# Altium PCB PS3604LRCF.PcbDoc
Units mm, origin at the board's own origin, x right, y up, seen from the top; angles counter-clockwise.
Board outline 120 x 39 mm, 2 copper layers (Top Layer, Bottom Layer), stack 1.571 mm thick; 97 components, 41 nets, 241 pads, 84 vias.
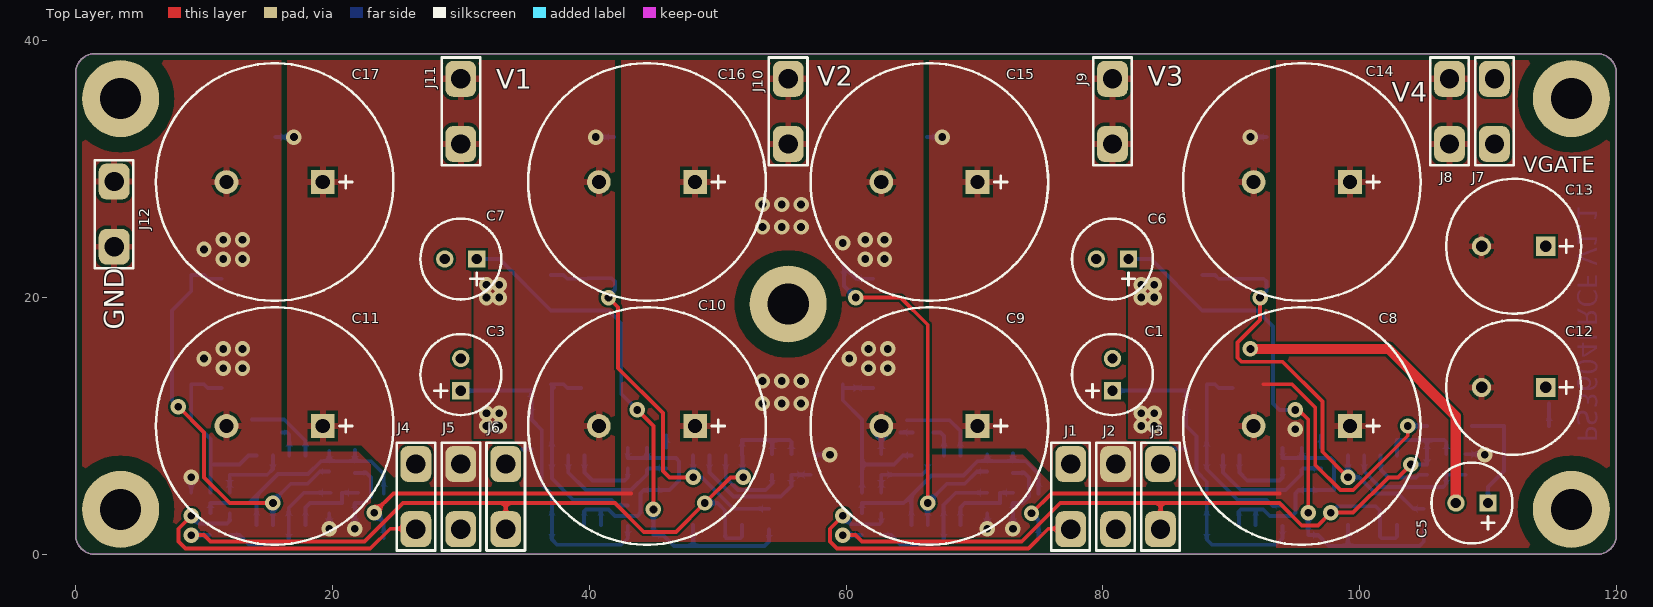
[diagram p0: Top Layer view]
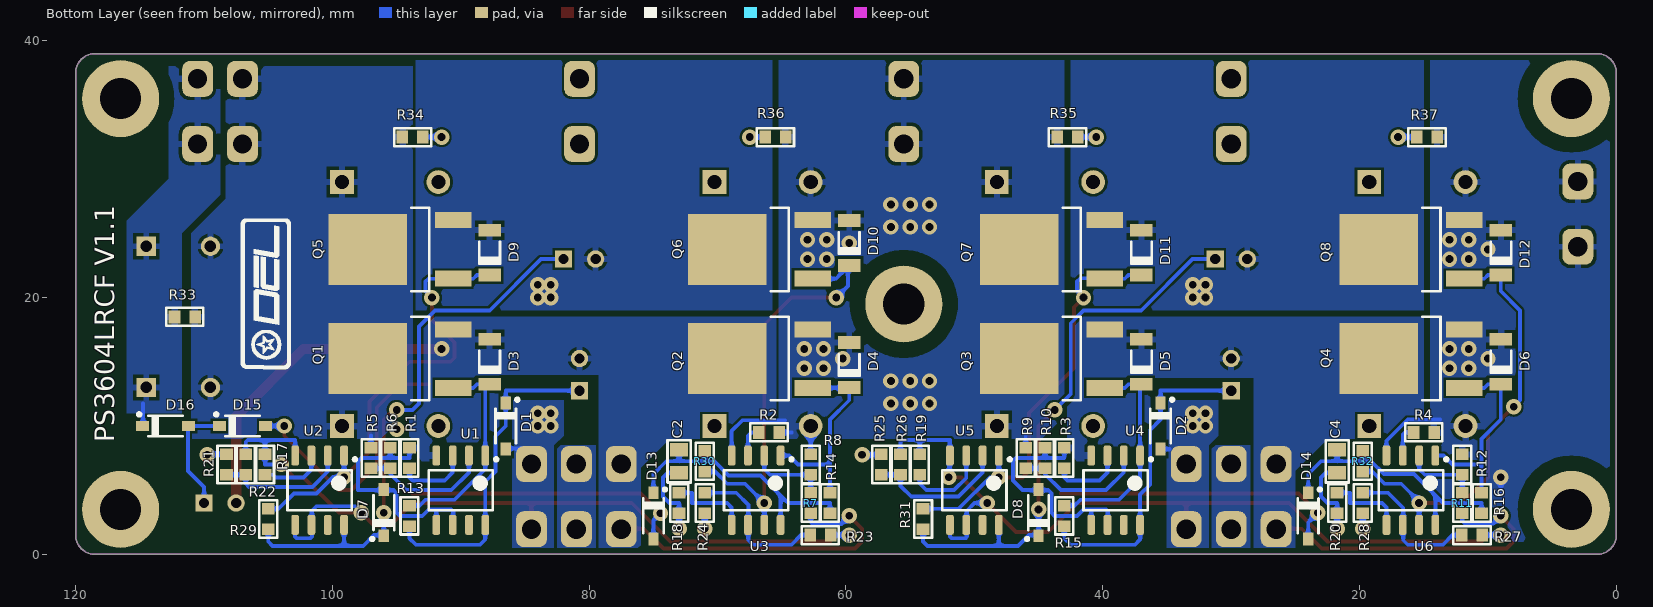
[diagram p1: Bottom Layer view, seen from below]
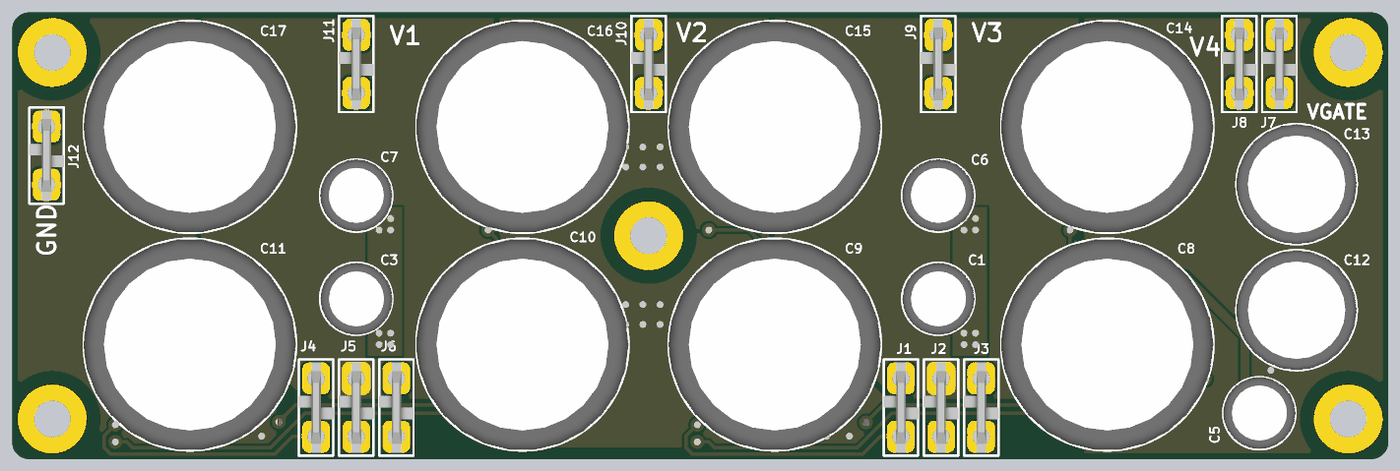
[diagram p2: 3D render of the assembled board from above, using the file's embedded part models]
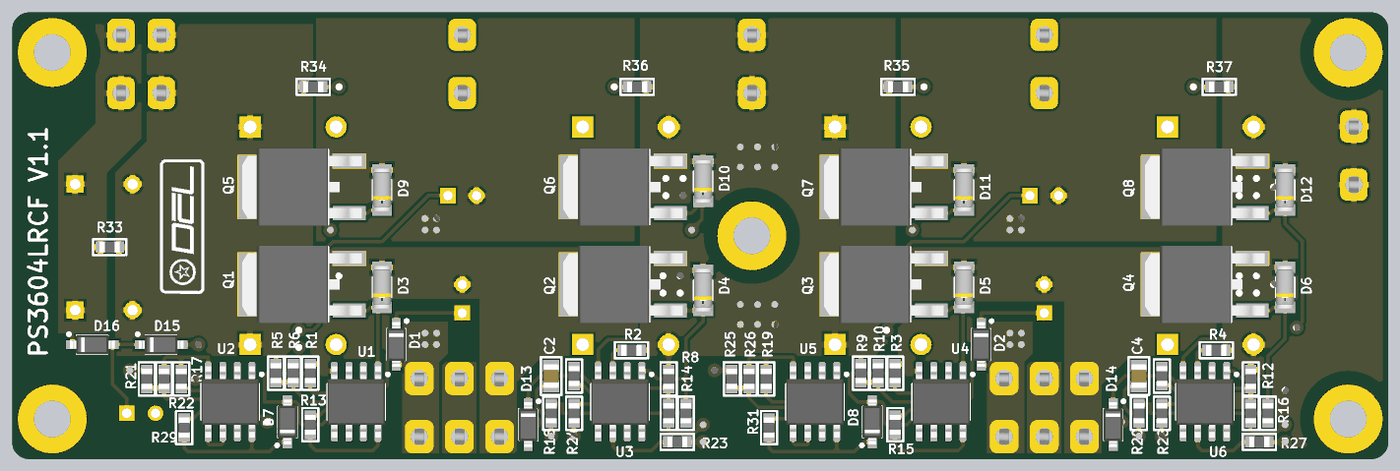
[diagram p3: 3D render of the assembled board from below, using the file's embedded part models]

## Layer stack, top to bottom
Top Solder: solder mask 0.0102, Solder Resist, Dk 3.5
Top Layer: signal copper 0.0356
Dielectric 1: dielectric 1.5, FR-4, Dk 4.8
Bottom Layer: signal copper 0.0356
Bottom Solder: solder mask 0.0102, Solder Resist, Dk 3.5

## Board outline
1.5,0 cw(c1.5,1.5) 0,1.5 0,37.5 cw(c1.5,37.5) 1.5,39 118.5,39 cw(c118.5,37.5) 120,37.5 120,1.5 cw(c118.5,1.5) 118.5,0

## Design rules (kind name [scope] priority, off if disabled: settings)
Clearance Clearance_MH [(ObjectKind = 'Pad') And (AsMM(PadXSize_AllLayers) = 6) vs (OnLayer('Top Layer')) or (OnLayer('Bottom Layer'))] p1: gap=1.2 ignorepadtopadclearanceinfootprint=FALSE except(0: Arc-Hole Track-Hole SMDPad-Hole THPad-Hole Via-Hole Fill-Hole Poly-Hole Region-Hole Text-Hole)
Clearance [All] p2: gap=0.2 ignorepadtopadclearanceinfootprint=FALSE
Height [All] p1: minheight=0 maxheight=55 prefheight=30
HoleSize [All] p1: absolutevalues=TRUE maxlimit=4 minlimit=0.3 maxpercent=80.000 minpercent=20.000
HoleToHoleClearance [All] p1: gap=0.2 allowstackedmicrovias=TRUE
MinimumSolderMaskSliver [All] p1: minsoldermaskwidth=0.1
PolygonConnect PolygonConnectDirect [InComponent('Q1') Or InComponent('Q2') Or InComponent('Q3') Or InComponent('Q4') Or InComponent('Q5') Or InComponent('Q6') Or InComponent('Q7') Or InComponent('Q8') Or InComponent('J1') Or InComponent('J2') Or InComponent('J3') Or InComponent('J4') Or InComponent('J5') Or InComponent('J6')] p1: connectstyle=Direct reliefconductorwidth=0.254 reliefentries=4 polygonreliefangle="90 Angle" airgapwidth=0.254
PolygonConnect PolygonConnectReliefPower [InComponent('XP12') Or InComponent('XP11') Or InComponent('XP10') Or InComponent('XP9') Or InComponent('XP8') Or InComponent('XP7')] p2: connectstyle=Relief reliefconductorwidth=1 reliefentries=4 polygonreliefangle="90 Angle" airgapwidth=0.25
PolygonConnect PolygonConnect_Via [IsVia] p3: connectstyle=Direct reliefconductorwidth=0.254 reliefentries=4 polygonreliefangle="90 Angle" airgapwidth=0.254
PolygonConnect [All] p4: connectstyle=Relief reliefconductorwidth=0.5 reliefentries=4 polygonreliefangle="90 Angle" airgapwidth=0.25
RoutingVias [All] p1: holewidth=0.5 width=1 viastyle="Through Hole" minholewidth=0.3 minwidth=0.6 maxholewidth=3 maxwidth=3
SilkToSilkClearance [All] p1: silktosilkclearance=-0.2
SilkToSolderMaskClearance [IsPad] p1: minsilkscreentomaskgap=0.1 clearancetoexposedcopper=TRUE
SolderMaskExpansion [All] p1: expansion=0.05
Width [All] p1: maxlimit=3 minlimit=0.2 preferedwidth=0.25
24 further rules are at their usual default settings.

## Components (designator, comment, footprint, x,y, rotation, side; value= is the part's Value field where it differs from the comment)
C1 "47u" CAPPR250-630X1120 80.75,14 r90 top
C2 "10u" CAPC2012X135N 73,7.25 r90 bottom
C3 "47u" CAPPR250-630X1120 30,14 r90 top
C4 "10u" CAPC2012X135N 21.75,7.25 r90 bottom
C5 "47u" CAPPR250-630X1120 108.75,4 r180 top
C6 "47u" CAPPR250-630X1120 80.75,23 r180 top
C7 "47u" CAPPR250-630X1120 30,23 r180 top
C8 "10000u" CAPPR750-1850X3750 95.5,10 r180 top
C9 "10000u" CAPPR750-1850X3750 66.5,10 r180 top
C10 "10000u" CAPPR750-1850X3750 44.5,10 r180 top
C11 "10000u" CAPPR750-1850X3750 15.5,10 r180 top
C12 "470u" CAPPR500-1050X2200 112,13 r180 top
C13 "470u" CAPPR500-1050X2200 112,24 r180 top
C14 "10000u" CAPPR750-1850X3750 95.5,29 r180 top
C15 "10000u" CAPPR750-1850X3750 66.5,29 r180 top
C16 "10000u" CAPPR750-1850X3750 44.5,29 r180 top
C17 "10000u" CAPPR750-1850X3750 15.5,29 r180 top
D1 "1N4148W" SOD3715X145N 86.5,10 r270 bottom
D2 "1N4148W" SOD3715X145N 35.5,10 r270 bottom
D3 "BZV55-C15" DIOMELF3515N 87.75,15 r90 bottom
D4 "BZV55-C15" DIOMELF3515N 59.75,14.75 r90 bottom
D5 "BZV55-C15" DIOMELF3515N 37,15 r90 bottom
D6 "BZV55-C15" DIOMELF3515N 9,15 r90 bottom
D7 "1N4148W" SOD3715X145N 96,3.25 r90 bottom
D8 "1N4148W" SOD3715X145N 45,3.25 r90 bottom
D9 "BZV55-C15" DIOMELF3515N 87.75,23.5 r90 bottom
D10 "BZV55-C15" DIOMELF3515N 59.75,24.25 r90 bottom
D11 "BZV55-C15" DIOMELF3515N 37,23.5 r90 bottom
D12 "BZV55-C15" DIOMELF3515N 9,23.5 r90 bottom
D13 "1N4148W" SOD3715X145N 75,3 r270 bottom
D14 "1N4148W" SOD3715X145N 24,3 r270 bottom
D15 "1N4148W" SOD3715X145N 107,10 r180 bottom
D16 "1N4148W" SOD3715X145N 113,10 r180 bottom
J1 "Quixon™" MOLEX_19_70_54203 77.5,4.5 r0 top
J2 "Quixon™" MOLEX_19_70_54203 81,4.5 r0 top
J3 "Quixon™" MOLEX_19_70_54203 84.5,4.5 r0 top
J4 "Quixon™" MOLEX_19_70_54203 26.5,4.5 r0 top
J5 "Quixon™" MOLEX_19_70_54203 30,4.5 r0 top
J6 "Quixon™" MOLEX_19_70_54203 33.5,4.5 r0 top
J7 "Quixon™" MOLEX_19_70_54203 110.5,34.5 r0 top
J8 "Quixon™" MOLEX_19_70_54203 107,34.5 r0 top
J9 "Quixon™" MOLEX_19_70_54203 80.75,34.5 r0 top
J10 "Quixon™" MOLEX_19_70_54203 55.5,34.5 r0 top
J11 "Quixon™" MOLEX_19_70_54203 30,34.5 r0 top
J12 "Quixon™" MOLEX_19_70_54203 3,26.5 r0 top
Q1 "IRFR3607" TO228P991X239-3N-R546X521 94.75,15.25 r0 bottom
Q2 "IRFR3607" TO228P991X239-3N-R546X521 66.75,15.25 r0 bottom
Q3 "IRFR3607" TO228P991X239-3N-R546X521 44,15.25 r0 bottom
Q4 "IRFR3607" TO228P991X239-3N-R546X521 16,15.25 r0 bottom
Q5 "IRFR3607" TO228P991X239-3N-R546X521 94.75,23.75 r0 bottom
Q6 "IRFR3607" TO228P991X239-3N-R546X521 66.75,23.75 r0 bottom
Q7 "IRFR3607" TO228P991X239-3N-R546X521 44,23.75 r0 bottom
Q8 "IRFR3607" TO228P991X239-3N-R546X521 16,23.75 r0 bottom
R1 "4k7" RESC1608X55N 94,7.5 r270 bottom
R2 "4k7" RESC1608X55N 66,9.5 r0 bottom
R3 "4k7" RESC1608X55N 43,7.5 r270 bottom
R4 "4k7" RESC1608X55N 15,9.5 r0 bottom
R5 "10k" RESC1608X55N 97,7.5 r90 bottom
R6 "10k" RESC1608X55N 95.5,7.5 r270 bottom
R7 "10k" RESC1608X55N 62.75,4 r270 bottom
R8 "10k" RESC1608X55N 62.75,7 r270 bottom
R9 "10k" RESC1608X55N 46,7.5 r90 bottom
R10 "10k" RESC1608X55N 44.5,7.5 r270 bottom
R11 "10k" RESC1608X55N 12,4 r270 bottom
R12 "10k" RESC1608X55N 12,7 r270 bottom
R13 "10k" RESC1608X55N 94,3 r270 bottom
R14 "10k" RESC1608X55N 61.25,4 r270 bottom
R15 "10k" RESC1608X55N 43,3 r270 bottom
R16 "10k" RESC1608X55N 10.5,4 r270 bottom
R17 "4k7" RESC1608X55N 105.25,7 r270 bottom
R18 "4k7" RESC1608X55N 73,4 r90 bottom
R19 "4k7" RESC1608X55N 54.25,7 r270 bottom
R20 "4k7" RESC1608X55N 21.75,4 r90 bottom
R21 "10k" RESC1608X55N 108.25,7 r90 bottom
R22 "10k" RESC1608X55N 106.75,7 r270 bottom
R23 "10k" RESC1608X55N 62,1.5 r180 bottom
R24 "10k" RESC1608X55N 71,4 r90 bottom
R25 "10k" RESC1608X55N 57.25,7 r90 bottom
R26 "10k" RESC1608X55N 55.75,7 r270 bottom
R27 "10k" RESC1608X55N 11.25,1.5 r180 bottom
R28 "10k" RESC1608X55N 19.75,4 r90 bottom
R29 "10k" RESC1608X55N 105,2.75 r270 bottom
R30 "10k" RESC1608X55N 71,7.25 r90 bottom
R31 "10k" RESC1608X55N 54,2.75 r270 bottom
R32 "10k" RESC1608X55N 19.75,7.25 r90 bottom
R33 "4k7" RESC1608X55N 111.5,18.5 r0 bottom
R34 "4k7" RESC1608X55N 93.75,32.5 r0 bottom
R35 "4k7" RESC1608X55N 42.75,32.5 r0 bottom
R36 "4k7" RESC1608X55N 65.5,32.5 r0 bottom
R37 "4k7" RESC1608X55N 14.75,32.5 r0 bottom
U1 "LM393" SOIC127P600X175-8N 90,5 r270 bottom
U2 "LM393" SOIC127P600X175-8N 101,5 r270 bottom
U3 "LM393" SOIC127P600X175-8N 67,5 r270 bottom
U4 "LM393" SOIC127P600X175-8N 39,5 r270 bottom
U5 "LM393" SOIC127P600X175-8N 50,5 r270 bottom
U6 "LM393" SOIC127P600X175-8N 16,5 r270 bottom
? "" logo_2 105.25,19.5 r90 bottom

## Footprints (in the part's own frame and the unit in brackets; to place one, negate y for a bottom-side part, rotate by r counter-clockwise, add the part's x,y. Pads: shape width x height; smd on the part's side, far side on the other; paste and mask are expansions set on the pad)
CAPC2012X135N [mm] "Chip Capacitor, Body 2.0x1.25mm, IPC Medium Density"
  rect 1.05x1.4 smd: 1(-0.9,0) 2(0.9,0)
  silkscreen extent -1.65,-0.9 1.65,0.9, body extent -1.05,-0.67 1.05,0.68, height 1.25
CAPPR250-630X1120 [mm] "Capacitor, Radial, Pin spacing 2.5mm - Body Diameter 6.3mm X Body Height 11.2mm"
  rect 1.35x1.35 hole 0.8: 1(-1.25,0)
  round 1.35 hole 0.8: 2(1.25,0)
  silkscreen extent -3.15,-3.15 3.15,3.15, body extent -3.16,-3.16 3.14,3.11, height 11.2
CAPPR500-1050X2200 [mm] "Capacitor, Radial, Pin spacing 5.0mm - Body Diameter 10.5mm X Body Height 22mm"
  rect 1.5x1.5 hole 0.9: 1(-2.5,0)
  round 1.5 hole 0.9: 2(2.5,0)
  silkscreen extent -5.25,-5.25 5.25,5.25, body extent -5.25,-5.23 5.25,5.23, height 22
CAPPR750-1850X3750 [mm] "Capacitor, Radial, Pin spacing 7.5mm - Body Diameter 18.5mm X Body  Height 37.5mm"
  rect 1.85x1.85 hole 1.1: 1(-3.75,0)
  round 1.85 hole 1.1: 2(3.75,0)
  silkscreen extent -9.25,-9.25 9.25,9.25, body extent -9.25,-9.22 9.25,9.22, height 37.5
DIOMELF3515N [mm] "SOD80C, MELF Diode, 2-Leads, Body 3.5x1.5mm, IPC Medium Density"
  rect 1x1.75 smd: 1(-1.75,0) 2(1.75,0)
  silkscreen extent -0.85,-0.8 0.85,0.8, body extent -1.85,-0.8 1.85,0.8, height 1.6
logo_2 [mm]
  silkscreen extent -5.08,-2.02 6.65,1.86
MOLEX_19_70_54203 [mm] "0.250\" (6.35mm) Quick Connect Male Solder Connector Non-Insulated"
  rrect50% 2.4x2.8 hole 1.5: 1(0,-2.54) 1(0,2.54)
  silkscreen extent -1.5,-4.2 1.5,4.2, body extent -1.52,-3.94 1.52,3.94, height 10.53
RESC1608X55N [mm] "Chip Resistor, EIA 0603, Metric 1608, Body 1.6x0.8mm, IPC Medium Density"
  rect 0.9x1 smd: 1(-0.8,0) 2(0.8,0)
  silkscreen extent -1.45,-0.7 1.45,0.7, body extent -0.87,-0.47 0.88,0.48, height 0.55
SOD3715X145N [mm] "SOD Diode (SOD-123); 2.70mm W X 1.55mm L X 1.45mm H body, IPC Medium Density"
  rect 1x0.8 smd: 1(-1.8,0) 2(1.8,0)
  silkscreen extent -2.17,-0.8 1.35,1.02, body extent -1.95,-0.85 1.95,0.85, height 1.45
SOIC127P600X175-8N [mm] "SOIC 8, Pitch 1.27mm - Body 4x5mm, IPC Medium Density"
  rrect50% 1.55x0.6 smd: 1(-2.7,1.905) 2(-2.7,0.635) 3(-2.7,-0.635) 4(-2.7,-1.905) 5(2.7,-1.905) 6(2.7,-0.635) 7(2.7,0.635) 8(2.7,1.905)
  silkscreen extent -2.52,-2.5 1.55,2.88, body extent -3.1,-2.5 3.1,2.5, height 1.75
TO228P991X239-3N-R546X521 [mm] "TO-252AA DPAK TO, 2.28mm pitch; 2 pin,9.905mm L X 6.095mm W X 2.39mm H body, IPC Medium Density"
  rect 2.85x1.25 smd: 1(-4.15,2.28) 2(-4.15,-2.28)
  rect 6.1x5.55 smd: 3(2.5,0)
  silkscreen extent -2.3,-3.25 -0.9,3.25, body extent -5.22,-3.36 5.27,3.37, height 2.45

## Part data
C1 C3 C5 C6 C7: library part CAER_47UF_50V_20%_EXR470M50B, "Polarised capacitor", Case="LS2.5 D6.3 x H11", Manufacturer=HITANO, Manufacturer Part Number=EXR470M50B, Tolerance=±20%, Voltage=50V, Author=DEL, ComponentHeight=11mm, Component Type=Standard, CreateDate=09.03.2018, LatestRevisionDate=09.03.2018, Mounted=Yes, Part Description="Aluminum Electrolytic Capacitor (EXR Serie)", Part Number=CAER_47UF_50V_20%_EXR470M50B, Pin Count=2, SMD=No, Socket=No, Status=None
C2 C4: library part CC0805_10UF_16V_10%_X7R, "Non-polarised capacitor", Case=0805, Manufacturer=GENERIC, Manufacturer1 ComponentHeight=1.4mm, Manufacturer1 Example=KEMET, Manufacturer1 Part Number=C0805C106K4PAC, Tolerance=±10%, Voltage=16V, Author=ELMAN, Component Type=Standard, CreateDate=14.04.2016, HelpURL=\\cern.ch\dfs\Applications\Altium\Datasheets\CC1206_X5R_KEMET.pdf, LatestRevisionDate=14.04.2016, Manufacturer Part Number=CC0805_10UF_16V_10%_X7R, Mounted=Yes, Part Description="SMD Multilayer Chip Ceramic Capacitor", Part Number=CC0805_10UF_16V_10%_X7R, Pin Count=2, SMD=Yes, Socket=No, Status=Preferred, TC=X7R
C8 C9 C10 C11 C14 C15 C16 C17: library part CAER_10000UF_16V_20%_EXR103M16B, "Polarised capacitor", Case="LS7.5 D18 x H36", Manufacturer=HITANO, Manufacturer Part Number=EXR103M16B, Tolerance=±20%, Voltage=16V, Author=DEL, ComponentHeight=36mm, Component Type=Standard, CreateDate=09.03.2018, LatestRevisionDate=09.03.2018, Mounted=Yes, Part Description="Aluminum Electrolytic Capacitor (EXR Serie)", Part Number=CAER_10000UF_16V_20%_EXR103M16B, Pin Count=2, SMD=No, Socket=No, Status=None
C12 C13: library part CAER_470UF_35V_20%_EXR471M35B, "Polarised capacitor", Case="LS5 D10 x H21", Manufacturer=HITANO, Manufacturer Part Number=EXR471M35B, Tolerance=±20%, Voltage=36V, Author=DEL, ComponentHeight=21mm, Component Type=Standard, CreateDate=09.03.2018, LatestRevisionDate=09.03.2018, Mounted=Yes, Part Description="Aluminum Electrolytic Capacitor (EXR Serie)", Part Number=CAER_470UF_35V_20%_EXR471M35B, Pin Count=2, SMD=No, Socket=No, Status=None
D1 D2 D7 D8 D13 D14 D15 D16: "Diode", Case=SOD-123, Manufacturer="VISHAY SEMICONDUCTORS", Manufacturer Part Number=1N4148W-E3-08, Power=150mA, Voltage=75V, Author=DEL, ComponentHeight=1.45mm, Component Type=Standard, CreateDate=27.01.2018, Device=1N4148W, LatestRevisionDate=27.01.2018, Mounted=Yes, PackageDescription="SOD Diode (SOD-123); 2.70mm W X 1.55mm L X 1.45mm H body, IPC Medium Density", Part Description="Small Signal Diode", Part Number=1N4148W, Pin Count=2, SMD=Yes, Socket=No
D3 D4 D5 D6 D9 D10 D11 D12: "Zener Diode", Case=SOD-80C, Manufacturer="PHILIPS NXP", Power=500mW, Voltage=15V, Author="CERN DEM JLC", ComponentHeight=1.6mm, Component Type=Standard, CreateDate=06.05.2008, Device=BZV55-C15, HelpURL=\\cern.ch\dfs\Applications\Altium\Datasheets\BZV55.pdf, LatestRevisionDate=06.05.2008, Manufacturer Part Number=BZV55-C15, Mounted=Yes, PackageDescription="SOD80C, MELF Diode, 2-Leads, Body 3.5x1.5mm, IPC Medium Density", Part Description="Voltage Regulator Diode", Part Number=BZV55-C15, Pin Count=2, SMD=Yes, Socket=No
J1 J2 J3 J4 J5 J6 J7 J8 J9 J10 J11 J12: library part MOLEX_19_70_54203, "Single Pin Male", Manufacturer=MOLEX, Manufacturer Part Number=19_70_54203, Author=DEL, ComponentHeight=10.29mm, Component Type=Standard, CreateDate=09.03.2018, Family=Quixon™, LatestRevisionDate=09.03.2018, Mounted=Yes, Part Description="0.250\" (6.35mm) Quick Connect Male Solder Connector Non-Insulated", Part Number=MOLEX_19_70_54203, Pin Count=1, SMD=No, Socket=No, Status=None
Q1 Q2 Q3 Q4 Q5 Q6 Q7 Q8: library part IRFR3607PbF, "N-CHANNEL MOSFET WITH DIODE", Case=DPAK, Manufacturer="INTERNATIONAL RECTIFIER", Author=D_EL, ComponentHeight=2.39mm, Component Type=Standard, CreateDate=09.03.2018, Device=IRFR3607, LatestRevisionDate=09.03.2018, Manufacturer Part Number=IRFR3607PbF, Mounted=Yes, PackageDescription="TO-252AA DPAK TO, 2.28mm pitch; 2 pin,9.905mm L X 6.095mm W X 2.39mm H body, IPC Medium Density", Part Description="75V 56A 7.34 mOhm N-Channel", Part Number=IRFR3607PbF, Pin Count=3, SMD=Yes, Socket=No
R1 R2 R3 R4 R17 R18 R19 R20 R33 R34 R35 R36 R37: library part R0603_4K7_1%_0.1W_100PPM, "Resistor - 1%", Case=0603, Manufacturer=GENERIC, Manufacturer1 ComponentHeight=0.55mm, Manufacturer1 Example="NIC COMPONENT", Manufacturer1 Part Number=NRC06F4701TRF, Power=0.1W, Tolerance=±1%, Author="CERN DEM JLC", Component Type=Standard, CreateDate=03.12.2007, HelpURL=\\cern.ch\dfs\Applications\Altium\Datasheets\R0603_NIC_NRC.pdf, LatestRevisionDate=13.03.2008, Manufacturer Part Number=R0603_4K7_1%_0.1W_100PPM, Mounted=Yes, Part Description="General Purpose Thick Film Chip Resistor", Part Number=R0603_4K7_1%_0.1W_100PPM, Pin Count=2, SMD=Yes, Socket=No, Status=Preferred, TC=±100ppm/°C
R5 R6 R7 R8 R9 R10 R11 R12 R13 R14 R15 R16 R21 R22 R23 R24 R25 R26 R27 R28 R29 R30 R31 R32: library part R0603_10K_1%_0.1W_100PPM, "Resistor - 1%", Case=0603, Manufacturer=GENERIC, Manufacturer1 ComponentHeight=0.55mm, Manufacturer1 Example="NIC COMPONENT", Manufacturer1 Part Number=NRC06F1002TRF, Power=0.1W, Tolerance=±1%, Author="CERN DEM JLC", Component Type=Standard, CreateDate=03.12.2007, HelpURL=\\cern.ch\dfs\Applications\Altium\Datasheets\R0603_NIC_NRC.pdf, LatestRevisionDate=13.03.2008, Manufacturer Part Number=R0603_10K_1%_0.1W_100PPM, Mounted=Yes, Part Description="General Purpose Thick Film Chip Resistor", Part Number=R0603_10K_1%_0.1W_100PPM, Pin Count=2, SMD=Yes, Socket=No, Status=Preferred, TC=±100ppm/°C
U1 U2 U3 U4 U5 U6: library part LM393M/NOPB, "Dual Operational Amplifier", Case=SOIC8, Manufacturer="NATIONAL SEMICONDUCTOR", Author="CERN DEM JLC", ComponentHeight=1.75mm, Component Type=Standard, CreateDate=18.11.2011, Device=LM393, HelpURL=\\cern.ch\dfs\Applications\Altium\Datasheets\LM393M-NOPB.pdf, LatestRevisionDate=18.11.2011, Manufacturer Part Number=LM393M/NOPB, Mounted=Yes, PackageDescription="SOIC 8, Pitch 1.27mm - Body 4x5mm, IPC Medium Density", Part Description="Low Power Low Offset Voltage Dual Comparators", Part Number=LM393M/NOPB, Pin Count=8, SMD=Yes, Socket=No

## Free pads (board coordinates)
  round 6 hole 3.2: MH1(3.5,35.5) MH2(3.5,3.5) MH3(55.5,19.5) MH4(116.5,35.5) MH5(116.5,3.5)

## Via types
v1: diameter 1.2, hole 0.6, Top Layer to Bottom Layer, tented both sides, 84 vias

## Nets (pads, with @x,y where several pads share a name; then routed paths per layer and width w, separated by ;. In a path a pad name is that pad's centre, name@x,y a point inside that pad or via, vN(x,y) a via of type N, cw(c..) or ccw(c..) an arc to the next point about the centre after c; other vN are vias at no path point)
0V: C4.1 C11.2 C17.2 D6.2 D12.2 J12.1 Q4.2 Q8.2 R4.1 R12.1 R20.1 R28.1 R37.1 U6.4 | length 14.7
  Bottom Layer w0.3: 9,4.8 v1(9,6) ; 13.75,10.5 16.25,10.5 17.905,8.845 U6.4 ; v1(19.75,2) R28.1 ; v1(21.75,2) 21.75,4 22.5,4 23,4.5 23,6 22.65,6.35 C4.1
  other v1: 11.5,14.5 13,14.5 10,15.25 11.5,16 13,16 11.5,23 13,23 10,23.75 11.5,24.5 13,24.5
COM1: C1.2 C5.2 D3.2 D7.2 J1.1 Q1.2 Q2.3 R1.1 R6.1 R7.2 U1.4 U1.5 U1.6 | length 70.7
  Top Layer w0.3: v1(59.75,3) 58.75,2 58.75,1 59.3,0.45 74.2,0.45 75.75,2 77.5,2 J1.1@77.75,2
  Top Layer w0.8: v1(91.5,16) 102.25,16 107.5,10.75 C5.2
  Bottom Layer w0.3: v1(59.75,3) 60.4,2.35 62.6,2.35 62.75,2.5 R7.2 ; U1.6@90.6,2.3 90.6,3.35 90.75,3.5 92.5,3.5 93,3 94.75,3 95,3.25 95,4.75 95.25,5 96,5 98,5 98,7.25 97.75,7.5 95.5,7.5 ; U1.5 91.905,3.345 ; R1.1 94,7.5 95.5,7.5 ; R6.1 95.5,7.5
COM2: C6.2 D1.2 D9.2 J3.1 Q5.2 Q6.3 R17.1 R22.1 R23.2 U2.4 U2.5 U2.6 | length 71.1
  Top Layer w0.3: v1(59.75,1.5) 60.75,1.5 61.25,1 73.686,1 76.686,4 93.75,4 95.5,2.25 96.75,2.25 v1(97.75,3.25) 99.5,3.25 102.25,6 103,6 v1(104,7) ; J3.1@84.5,2 84.5,4
  Bottom Layer w0.3: v1(59.75,1.5) R23.2 ; J3.1@85,8.25 D1.2@86.5,8.25 ; v1(97.75,3.25) 98.25,3.75 101.25,3.75 101.6,3.4 101.6,2.3 101.6,1.4 101.75,1.25 102.75,1.25 102.905,1.405 U2.5 ; U2.4 102.905,8.905 106.595,8.905 106.75,8.75 R22.1 ; v1(104,7) 105.25,7 R17.1 105.25,8.905
  other v1: 83,10 84,10 83,11 84,11 83,20 84,20 83,21 84,21
COM3: C2.1 C9.2 C10.1 C15.2 C16.1 D4.2 D10.2 D14.2 J10.1 Q2.2 Q3.3 Q6.2 Q7.3 R2.1 R8.1 R9.2 R18.1 R24.1 R25.2 R35.2 R36.1 U3.4 | length 41.7
  Top Layer w0.3: v1(23.25,3.25) 24.75,4.75 43.25,4.75
  Bottom Layer w0.3: v1(23.25,3.25) 24,2.5 D14.2@24,1.25 ; R9.2 46,9.25 ; R25.2@57.55,7.75 v1(58.75,7.75) ; R8.1 C9.2@62.75,9.5 ; 64.25,9.5 R2.1 ; 64.75,10.45 68.05,10.45 68.905,9.595 U3.4 ; v1(71,2) R24.1 ; v1(73,2) R18.1 73,4 73.75,4 74.25,4.5 74.25,6 73.9,6.35 C2.1
  other v1: 53.5,11.75 55,11.75 56.5,11.75 53.5,13.5 55,13.5 56.5,13.5 61.75,14.5 63.25,14.5 60.25,15.25 61.75,16 63.25,16 61.5,23 63,23 59.75,24.25 61.5,24.5 63,24.5 53.5,25.5 55,25.5 56.5,25.5 53.5,27.25 55,27.25 56.5,27.25
COM4: C3.2 D5.2 D8.2 J4.1 Q3.2 Q4.3 R3.1 R10.1 R11.2 U4.4 U4.5 U4.6 | length 45.3
  Top Layer w0.3: v1(9,3) 8,2 8,1 8.55,0.45 22.95,0.45 24.5,2 26.5,2 J4.1@27,2
  Bottom Layer w0.3: v1(9,3) 9.6,2.4 11.8,2.4 12,2.6 R11.2 ; U4.6@39.6,2.3 39.6,3.35 39.75,3.5 41.5,3.5 42,3 43.75,3 44,3.25 44,4.75 44.25,5 45,5 46.25,5 47,5.75 47,7.25 46.75,7.5 44.5,7.5 ; U4.5 40.905,3.405 ; R3.1 43,7.5 44.5,7.5 ; R10.1 44.5,7.5
COM5: C7.2 D2.2 D11.2 J6.1 Q7.2 Q8.3 R19.1 R26.1 R27.2 U5.4 U5.5 U5.6 | length 66.4
  Top Layer w0.3: v1(9,1.5) 10,1.5 10.5,1 22.5,1 25.5,4 42,4 42.125,3.875 44.25,1.75 46.75,1.75 v1(49,4) 51,6 v1(52,6) ; J6.1@33.5,2 33.5,4
  Bottom Layer w0.3: v1(9,1.5) R27.2 ; 34.8,8.2 D2.2 ; v1(49,4) 50,4 50.6,3.4 50.6,1.355 50.705,1.25 51.75,1.25 51.905,1.405 U5.5 ; U5.4 51.905,8.905 55.595,8.905 55.75,8.75 R26.1 ; U5.4@51.937,7.668 51.937,6.063 v1(52,6) ; R19.1 54.25,8.905
  other v1: 32,10 33,10 32,11 33,11 32,20 33,20 32,21 33,21
NetC1_1: C1.1 D1.1 R13.2 U1.8 | length 25.2
  Bottom Layer w0.3: C1.1 86.5,12.75 86.5,10 87.3,9.2 87.3,6.45 88.095,5.655 U1.8 88.095,1.155 88.5,0.75 93.5,0.75 94,1.25 R13.2
NetC2_2: C2.2 D13.1 R14.2 R30.2 U3.8 | length 21.3
  Bottom Layer w0.3: R14.2 61.25,4 64.5,4 65.095,4.595 ; U3.8 65.095,4.595 ; R30.2@71,7.8 71,7.25 ; C2.2@73,7.85 73,7.25 ; D13.1@75,4.75 D13.1 75,6.25 74,7.25 73,7.25 ; 65.095,4.595 66.65,6.15 69.15,6.15 70.25,7.25 71,7.25 ; 71,7.25 73,7.25
NetC3_1: C3.1 D2.1 R15.2 U4.8 | length 25
  Bottom Layer w0.3: C3.1 35.5,12.75 35.5,10.5 36.3,9.7 36.3,5.45 37.095,4.655 U4.8 37.095,1.155 37.5,0.75 42.5,0.75 43,1.25 R15.2
NetC4_2: C4.2 D14.1 R16.2 R32.2 U6.8 | length 21.6
  Bottom Layer w0.3: R16.2 10.5,4 13.5,4 14.095,4.595 ; U6.8 14.095,4.595 ; R32.2 19.75,7.25 ; C4.2 21.75,7.25 ; D14.1@24,4.75 D14.1 24,6.25 23,7.25 21.75,7.25 ; 14.095,4.595 15.75,6.25 18.105,6.25 19.105,7.25 19.75,7.25 ; 19.75,7.25 21.75,7.25
NetC5_1: C5.1 D15.1 D16.2 | length 9
  Bottom Layer w0.3: D15.1@108.75,10 111.25,10 111.25,6.5 110,5.25 C5.1
NetC6_1: C6.1 D7.1 R29.2 U2.8 | length 43.8
  Top Layer w0.3: v1(95,11.25) 95.25,11.25 96,10.5 v1(96,3.25)
  Bottom Layer w0.3: C6.1 83.75,23 87.75,19 92,19 93.25,17.75 93.25,11.75 93.75,11.25 v1(95,11.25) ; v1(96,3.25) 96,1.5 96.75,1.5 97.595,0.655 99.095,0.655 ; U2.8 99.095,0.655 ; R29.2 105,1 104.655,0.655 99.095,0.655
NetC7_1: C7.1 D8.1 R31.2 U5.8 | length 42.9
  Top Layer w0.3: v1(43.75,11.25) 45,10 v1(45,3.5)
  Bottom Layer w0.3: C7.1 33,23 37,19 41.504,19 42.5,18.004 42.5,12.5 v1(43.75,11.25) ; v1(45,3.5) 45,1.5 45.75,1.5 46.595,0.655 48.095,0.655 ; U5.8 48.095,0.655 ; R31.2 54,1 53.655,0.655 48.095,0.655
NetD3_1: D3.1 Q1.1 R13.1 U1.1 | length 15.8
  Bottom Layer w0.3: Q1.1@90.125,12.965 89.035,12.965 88.75,13.25 88.095,13.25 U1.1 88.095,6.655 90.5,4.25 92.75,4.25 93.2,3.8 R13.1
NetD4_1: D4.1 Q2.1 R14.1 U3.1 | length 15.6
  Bottom Layer w0.3: D4.1@59.75,13.25 D4.1 D4.1@59.75,12.965 ; R14.1 61.25,7 ; Q2.1@62.125,12.965 D4.1@59.75,12.965 ; U3.1 64.45,7.7 63.75,7 61.25,7 ; D4.1@59.75,12.965 59.75,12 61.25,10.5 61.25,7
NetD5_1: D5.1 Q3.1 R15.1 U4.1 | length 16.8
  Bottom Layer w0.3: D5.1@37.095,13.125 U4.1 37.095,5.905 38.75,4.25 41.75,4.25 42.2,3.8 R15.1 ; D5.1@37.25,13 D5.1 38,13.25 38.285,12.965 Q3.1@39.375,12.965
NetD6_1: D6.1 Q4.1 R16.1 U6.1 | length 15.4
  Bottom Layer w0.3: R16.1 10.5,7 ; Q4.1@11.375,12.965 10.285,12.965 10,13.25 D6.1 9,10.5 10.5,9 10.5,7 ; U6.1 13.45,7.7 12.75,7 10.5,7
NetD9_1: D9.1 Q5.1 R29.1 U2.1 | length 35.4
  Top Layer w0.3: v1(92.25,20) 92.25,18.25 90.5,16.5 90.5,15.317 90.817,15 94,15 97.1,11.9 97.1,7.995 v1(99.095,6)
  Bottom Layer w0.3: D9.1 88.75,21.75 89.035,21.465 92.535,21.465 92.75,21.25 92.75,20.5 v1(92.25,20) ; U2.1 v1(99.095,6) 100,6 101.25,4.75 103,4.75 104.2,3.55 R29.1
NetD10_1: D10.1 Q6.1 R30.1 U3.7 | length 33.5
  Top Layer w0.3: v1(60.75,20) 64.25,20 66.365,17.885 v1(66.365,4)
  Bottom Layer w0.3: v1(60.75,20) 59.85,20.9 D10.1@59.85,22.4 ; Q6.1@62.125,21.465 60.785,21.465 D10.1@59.85,22.4 ; U3.7 v1(66.365,4) 67.865,5.5 69.25,5.5 70.2,6.45 R30.1 ; D10.1@59.85,22.4 59.85,22.5 D10.1 D10.1@59.85,22.4
NetD11_1: D11.1 Q7.1 R31.1 U5.1 | length 33.2
  Top Layer w0.3: v1(41.5,20) 42.25,19.25 42.25,14.5 45.75,11 45.75,6.5 46.25,6 v1(48.095,6)
  Bottom Layer w0.3: D11.1 38,21.75 38.285,21.465 39.85,21.465 39.896,21.511 41.739,21.511 42,21.25 42,20.611 41.5,20.111 v1(41.5,20) ; U5.1 v1(48.095,6) 48.778,6 51.15,3.628 51.15,3.6 51.2,3.55 R31.1
NetD12_1: D12.1 Q8.1 R32.1 U6.7 | length 33.4
  Top Layer w0.3: v1(8,11.5) 10,9.5 10,6 12,4 v1(15.365,4) v1@15.5,4
  Bottom Layer w0.3: v1(8,11.5) 7.5,12 7.5,19 9,20.5 D12.1 10,21.75 10.285,21.465 Q8.1@11.375,21.465 ; U6.7 v1(15.365,4) 15.365,4.115 16.75,5.5 18.062,5.5 19.012,6.45 R32.1
NetR1_2: R1.2 U1.3 | length 5.8
  Bottom Layer w0.3: U1.3 90.635,6.365 91.25,5.75 93.75,5.75 94,6 R1.2
NetR2_2: R2.2 U3.3 | length 2.5
  Bottom Layer w0.3: R2.2 67.368,9.5 67.635,9.233 U3.3
NetR3_2: R3.2 U4.3 | length 5.8
  Bottom Layer w0.3: U4.3 39.635,6.365 40.25,5.75 42.75,5.75 43,6 R3.2
NetR4_2: R4.2 U6.3 | length 2.3
  Bottom Layer w0.3: R4.2@16.05,9.5 16.472,9.5 16.635,9.337 U6.3
NetR5_1: R5.1 R6.2 U1.2 | length 10.3
  Bottom Layer w0.3: U1.2 89.365,6.385 90.75,5 94.25,5 95.49,6.24 R6.2@95.49,6.59 ; R6.2@95.6,6.7 R5.1
NetR7_1: R7.1 R8.2 U3.2 | length 6.3
  Bottom Layer w0.3: R7.1 R8.2 65.922,6.2 66.365,6.643 U3.2
NetR9_1: R9.1 R10.2 U4.2 | length 10.3
  Bottom Layer w0.3: U4.2 38.365,6.385 39.75,5 43.25,5 44.49,6.24 R10.2@44.49,6.59 ; R10.2@44.6,6.7 R9.1
NetR11_1: R11.1 R12.2 U6.2 | length 6
  Bottom Layer w0.3: R11.1 R12.2 14.922,6.2 15.365,6.643 U6.2
NetR17_2: R17.2 U2.3 | length 5
  Bottom Layer w0.3: U2.3 101.635,6.615 102.25,6 104.414,6 104.614,6.2 R17.2
NetR18_2: R18.2 U3.5 | length 6.4
  Bottom Layer w0.3: U3.5 68.905,3.655 69.25,4 72,4 72,4.8 R18.2
NetR19_2: R19.2 U5.3 | length 6.7
  Bottom Layer w0.3: U5.3 50.635,5.951 51.586,5 53.75,5 54.25,5.5 R19.2
NetR20_2: R20.2 U6.5 | length 6.4
  Bottom Layer w0.3: U6.5 17.905,3.655 18.25,4 20.75,4 20.75,4.8 R20.2@22,4.8
NetR21_1: R21.1 R22.2 U2.2 | length 10.4
  Bottom Layer w0.3: U2.2 100.365,6.443 101.558,5.25 106.5,5.25 106.75,5.5 R22.2 R21.1
NetR23_1: R23.1 R24.2 U3.6 | length 11.8
  Bottom Layer w0.3: R23.1 63.5,1.5 64.25,0.75 67.25,0.75 67.6,1.1 67.6,2.3 67.6,3.85 68.55,4.8 R24.2
NetR25_1: R25.1 R26.2 U5.2 | length 11.2
  Bottom Layer w0.3: U5.2 49.365,6.385 51.25,4.5 54.916,4.5 55.75,5.334 R26.2 R25.1
NetR27_1: R27.1 R28.2 U6.6 | length 11.3
  Bottom Layer w0.3: R27.1 12.75,1.5 13.5,0.75 16.25,0.75 16.6,1.1 16.6,2.3 16.6,3.6 17.8,4.8 R28.2@19.875,4.8
V1: C10.2 C11.1 C16.2 C17.1 J5.1 J11.1 R35.1 R37.2 | length 2.9
  Bottom Layer w0.3: R37.2 v1(17,32.5) ; v1(40.5,32.5) R35.1
V3: C8.2 C9.1 C14.2 C15.1 D15.2 J2.1 J9.1 R34.1 R36.2 | length 24
  Top Layer w0.3: 92.5,13.25 94.75,13.25 96.55,11.45 96.55,6.95 98.5,5 99.509,5 103.75,9.241 v1(103.75,10)
  Bottom Layer w0.3: R36.2 v1(67.5,32.5) ; v1@91.25,32.5 R34.1@92.75,32.5 ; v1(103.75,10) D15.2 D15.2@105.25,10
  other v1: 91.5,32.5
V4: C8.1 C12.2 C13.2 C14.1 D13.2 J8.1 Q1.3 Q5.3 R5.2 R21.2 R33.1 R34.2 | length 24.5
  Top Layer w0.3: v1(74.45,3.2) 76,4.75 93.75,4.75
  Bottom Layer w0.3: v1(74.45,3.2) 75,2.65 D13.2@75,1.25 ; R5.2 97,9.25 ; R21.2 v1@109.7,7.8
  other v1: 109.75,7.75 95,9.75
VGATE: C12.1 C13.1 D16.1 J7.1 R33.2 | length 1.7
  Bottom Layer w0.3: D16.1@114.75,10 114.75,11.75
pads on no net: U1.7 U2.7 U4.7 U5.7

## Polygon pours and split planes (outlines as drawn)
V3 on Top Layer "V3_L01_P019" (solid, pour order 19): 66.5,38.5 66.5,8.25 74,8.25 77,5.25 93,5.25 93,38.5
V4 on Top Layer "V4_L01_P018" (solid, pour order 18): 93.5,38.5 93.5,0.5 119.5,0.5 119.5,38.5
COM3 on Top Layer "COM3_L01_P017" (solid, pour order 17): 42.5,38.5 66,38.5 66,7.75 73.75,7.75 76,5.5 76,1 42.5,1
V1 on Top Layer "V1_L01_P005" (solid, pour order 5): 16.5,38.5 16.5,8.5 22.25,8.5 25.5,5.25 42,5.25 42,38.5
0V on Top Layer "0V_L01_P002" (solid, pour order 2): 0.5,38.5 0.5,1 23,1 23,7 22,8 16,8 16,38.5
COM5 on Top Layer "COM5_L01_P001" (solid, pour order 1): 31,9 34,9 34,22 31,22
COM2 on Top Layer "COM2_L01_P009" (solid, pour order 9): 82,9 85,9 85,22 82,22
V4 on Bottom Layer "V4_L02_P013" (solid, pour order 13): 93.75,11.5 93.75,38 108.289,38 108.289,27.711 111,25 111,9 96.25,9
COM2 on Bottom Layer "COM2_L02_P012" (solid, pour order 12): 65.75,19 65.75,38.5 93.5,38.5 93.5,19 82,19
COM1 on Bottom Layer "COM1_L02_P011" (solid, pour order 11): 79.25,0.5 76,0.5 76,6.75 73.75,9 65.25,9 65.25,18.5 93.25,18.5 93.25,11.25 94,10.5 94,7.25 91.75,7.25 91.75,8.75 87,8.75 87,14 79.25,14
COM3 on Bottom Layer "COM3_L02_P008" (solid, pour order 8): 43,38.5 43,10.75 44.75,9 65.25,9 65.25,38.5
COM5 on Bottom Layer "COM5_L02_P006" (solid, pour order 6): 15,19 15,38.5 42.5,38.5 42.5,19 31,19
COM4 on Bottom Layer "COM4_L02_P004" (solid, pour order 4): 28.25,0.5 25,0.5 25,6.5 22.5,9 15,9 15,18.5 42.25,18.5 42.25,12 42.75,11.5 42.75,7.25 36.3,7.25 36.3,13.75 28.25,13.75
0V on Bottom Layer "0V_L02_P003" (solid, pour order 3): 0.5,38.5 14.5,38.5 14.5,1 0.5,1
VGATE on Bottom Layer "VGATE_L02_P016" (solid, pour order 16): 111.75,11 111.75,25 108.75,28 108.75,38 112.75,38 112.75,29.25 116,26 116,11
V1 on Bottom Layer "V1_L02_P010" (solid, pour order 10): 28.5,0.5 31.5,0.5 31.5,8.5 28.5,8.5
V3 on Bottom Layer "V3_L02_P015" (solid, pour order 15): 79.5,0.5 82.5,0.5 82.5,8.5 79.5,8.5
COM2 on Bottom Layer "COM2_L02_P014" (solid, pour order 14): 82,9.25 82.75,8.5 82.75,0.5 86,0.5 86,12 82,12
COM5 on Bottom Layer "COM5_L02_P007" (solid, pour order 7): 31,9.25 31.75,8.5 31.75,0.5 35,0.5 35,12 31,12

## Keep-outs
Keep-Out Layer:
  the board outline again, w0.1

## Other copper
Bottom Layer:
  text "PS3604LRCF V1.1" at 117,8.75 h1.5 r270

## Silkscreen, mask and mechanical layers (free items; w line width, h text height)
Top Overlay:
  text "V2" at 57.75,36.5 h1.52
  text "V3" at 83.5,36.5 h1.52
  text "V1" at 32.75,36.25 h1.52
  text "V4" at 102.5,35.25 h1.52
  text "VGATE" at 112.75,29.75 h1.2
  text "GND" at 3.75,17.5 h1.52 r90
Bottom Overlay:
  text "PS3604LRCF V1.1" at 117,8.75 h1.5 r270

## Dimensions
3.5,3.5 to 55.5,19.5 on Mechanical 14
116.5,3.5 to 116.5,35.5 on Mechanical 14
3.5,3.5 to 116.5,3.5 on Mechanical 14
1.5,0 to 1.5,39 on Mechanical 14
0,37.5 to 120,37.5 on Mechanical 14